# Altium PCB LimeSDR-Micro_mPCIe_1v4.PcbDoc (part 3 of 11)
Units mm, origin at the board's own origin, x right, y up, seen from the top; angles counter-clockwise.
Board outline 50.8 x 29.7 mm, 8 copper layers (Top, L2, L3, L4, L5, L6, L7, Bottom), stack 0.925 mm thick; 664 components, 386 nets, 2358 pads, 843 vias.
Unrouted connection lines stored in the file: 28.
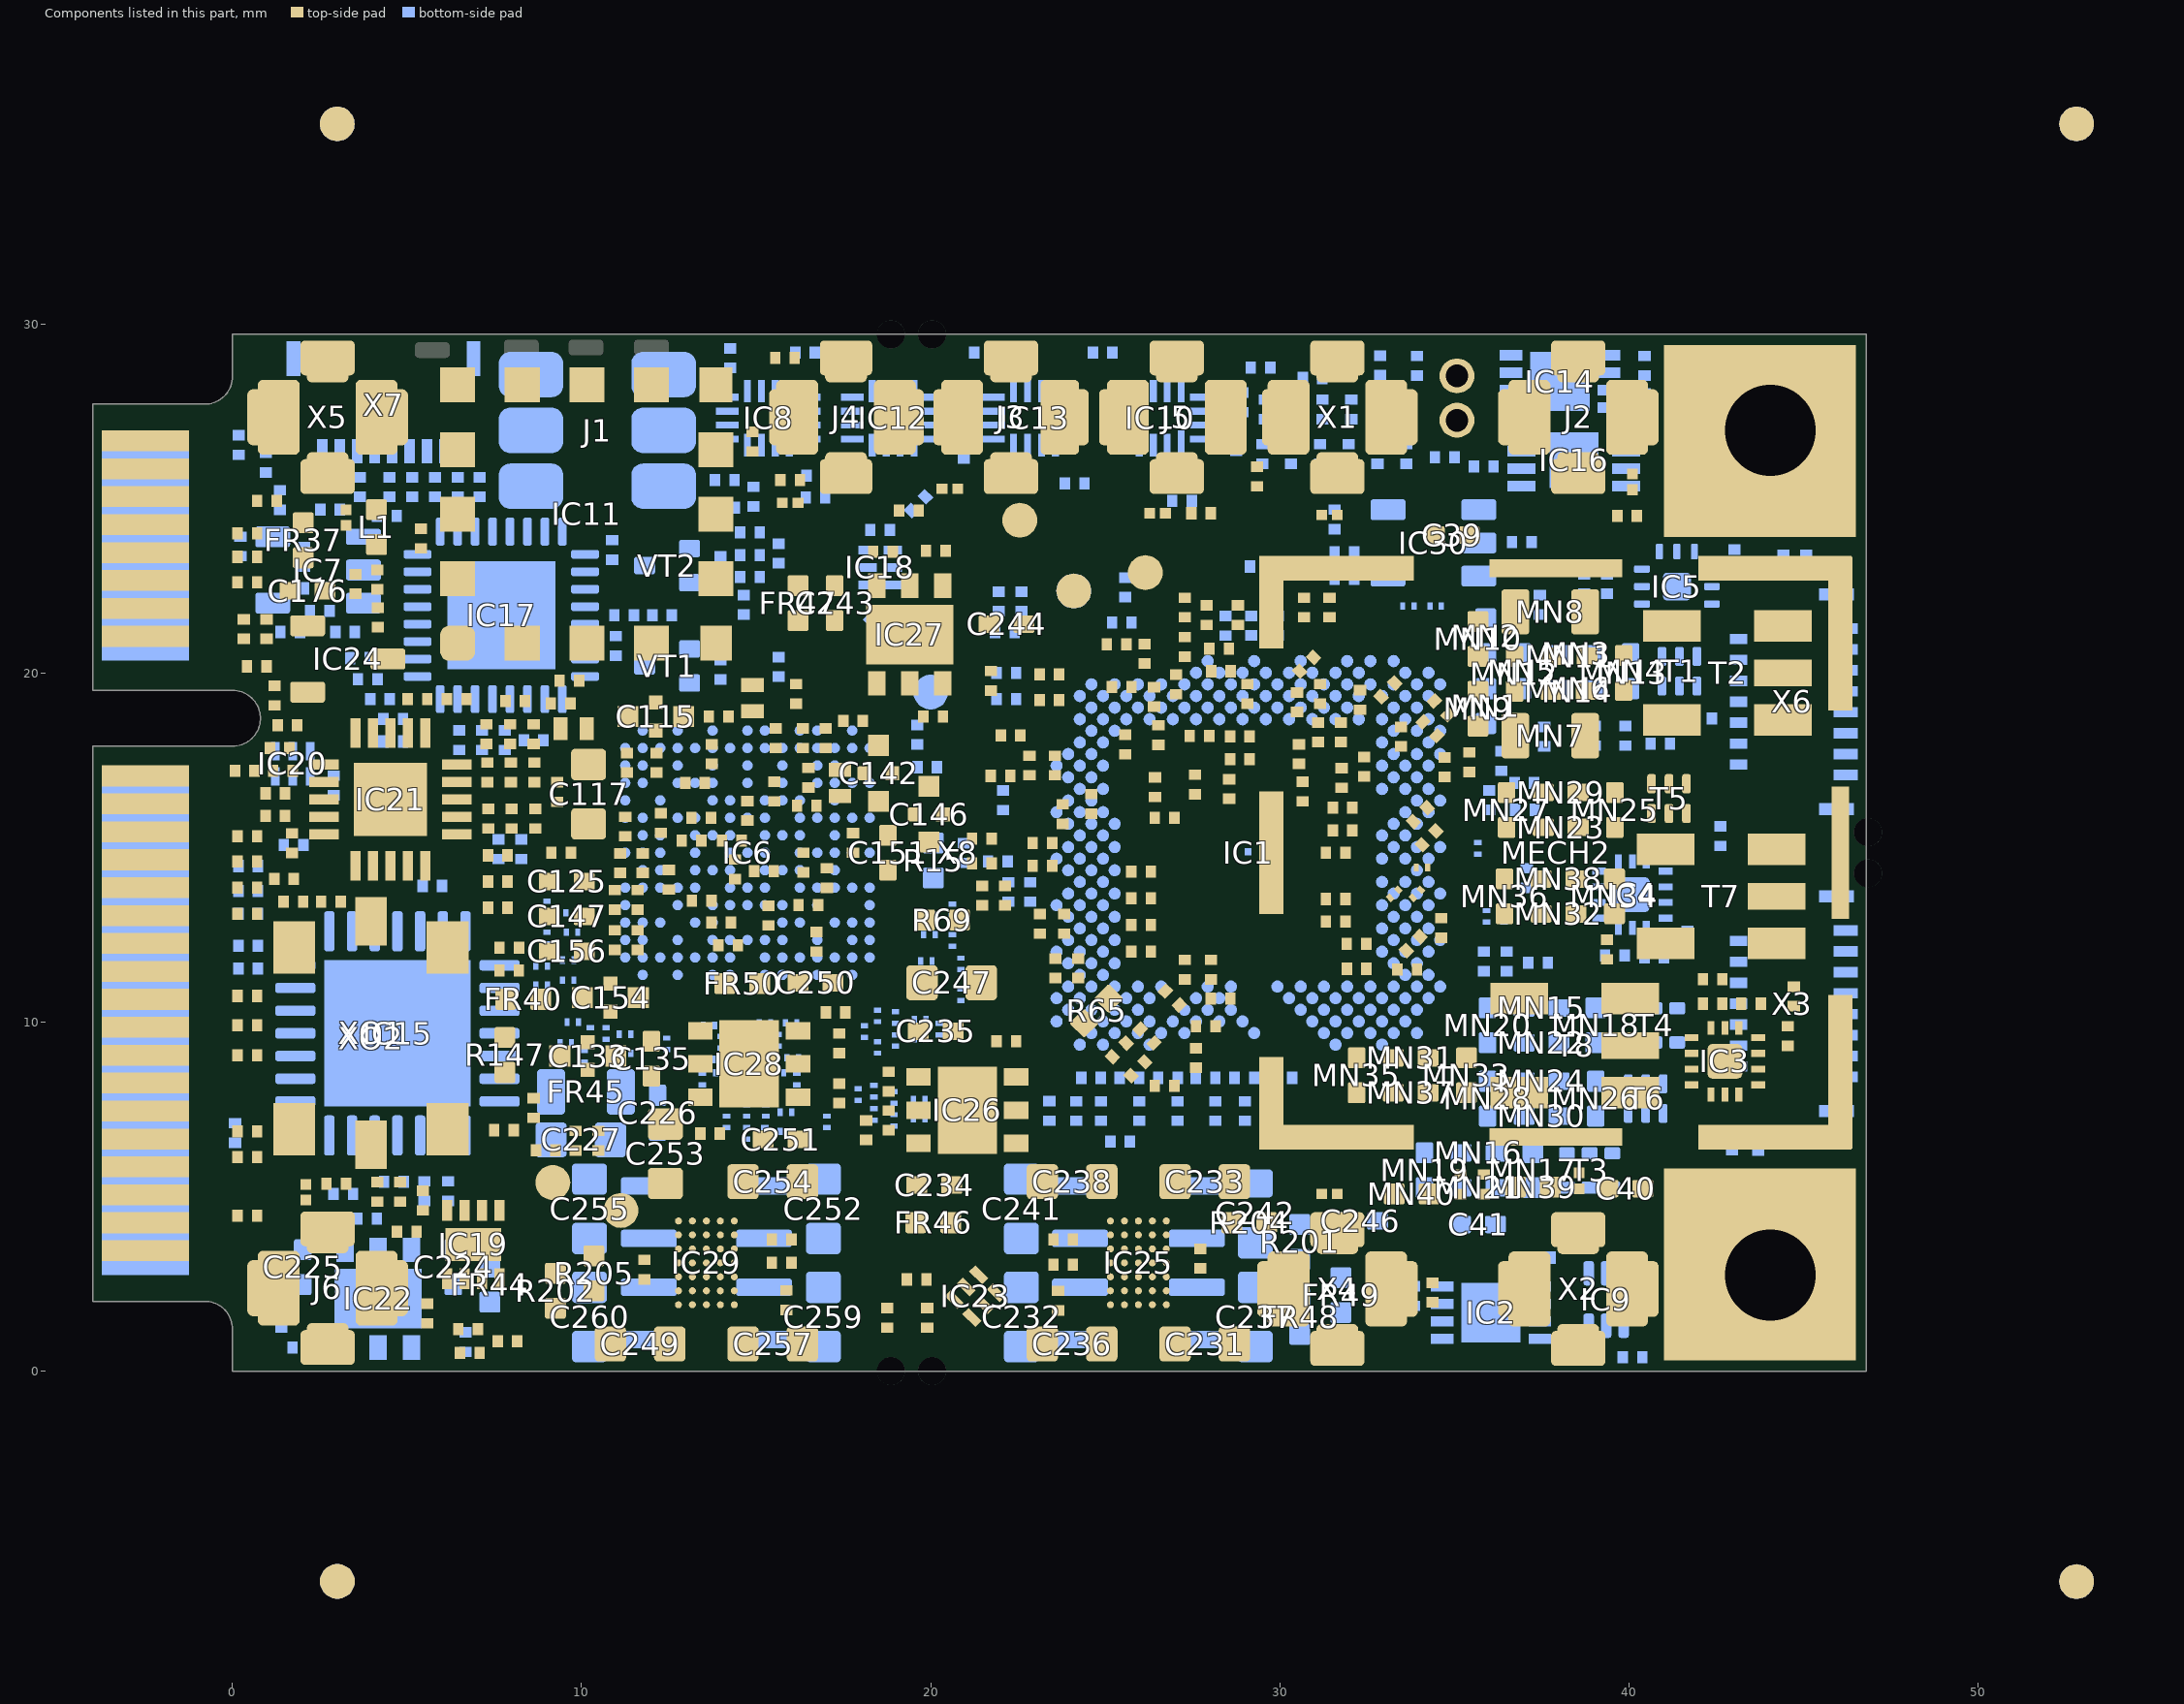
[diagram p8: the components of this part, seen from the top]

## Part data (continued)
C176 C224 C225 C234 C235 C243 C244 C246 C250 C251: library part Cap_0402, Capacitance=4.7µF, Manufacturer="Murata Electronics North America", Manufacturer Part Number 1=GRM155R60J475ME87D, Operating Temperature="-55°C ~ 85°C", Package / Case="0402 (1005 Metric)", Ratings=-, Supplier Part Number 1=490-5408-1-ND, Temperature Coefficient=X5R, Tolerance=±20%, Voltage - Rated=6.3V, Applications="General Purpose", Category=Capacitors, Features="Derating Recommended", Height - Seated (Max)=-, Lead Spacing=-, Lead Style=-, Mounting Type="Surface Mount, MLCC", Packaging="Cut Tape (CT)", Part Description="4.7µF ±20% 6.3V X5R Ceramic Capacitor -55°C ~ 85°C Surface Mount, MLCC 0402 (1005 Metric) 0.039\" L x 0.020\" W (1.00mm x 0.50mm)", RoHS="RoHS Compliant", Size / Dimension="0.039\" L x 0.020\" W (1.00mm x 0.50mm)", Supplier 1=Digi-Key, Thickness (Max)="0.022\" (0.55mm)"
C226: library part Cap_0402, Capacitance=1, Capacitance Tolerance="± 10%", Ceramic Capacitor Case="0402 [1005 Metric]", Dielectric Characteristic=X6, Manufacturer=TDK, Manufacturer Part Number 1=C1005X5R1E105K050BC, Supplier Part Number 1=445-9066-1-ND, Voltage Rating=10, MSL=-, Part Description="1µF ±10% 10V X5R Ceramic Capacitor -55°C ~ 85°C Surface Mount, MLCC 0402 (1005 Metric) 0.039\" L x 0.020\" W (1.00mm x 0.50mm)", Product Range="TDK - C Series", RoHS=YES, Supplier 1=Digi-Key
C227 C231 C233 C236 C238 C247 C249 C253 C254 C257: library part Cap_0603, Capacitance=10uF, Case/Package=0603, Case Code (Metric)=1608, Dielectric=X5R, Manufacturer=Murata, Manufacturer Part Number 1=GRM188R61A106ME69D, Max Operating Temperature=85°C, Min Operating Temperature=-55°C, Package Quantity=4000, Supplier Part Number 1=490-10475-1-ND, Tolerance=20%, Voltage Rating=10V, Case Code (Imperial)=0603, ComponentLink1Description=http://search.murata.co.jp/Ceramy/image/img/A01X/G101/ENG/GRM188R61C106MAAL-01.pdf?src-supplier=Digi-Key, ComponentLink1URL=http://search.murata.co.jp/Ceramy/image/img/A01X/G101/ENG/GRM188R61C106MAAL-01.pdf?src-supplier=Digi-Key, ComponentLink2Description=https://search.murata.co.jp/Ceramy/image/img/A01X/G101/ENG/GRM188R61C106MAAL-01.pdf?src-supplier=Digi-Key, ComponentLink2URL=https://search.murata.co.jp/Ceramy/image/img/A01X/G101/ENG/GRM188R61C106MAAL-01.pdf?src-supplier=Digi-Key, ComponentLink3Description=http://search.murata.co.jp/Ceramy/image/img/A01X/partnumbering_e_01.pdf?src-supplier=Digi-Key, ComponentLink3URL=http://search.murata.co.jp/Ceramy/image/img/A01X/partnumbering_e_01.pdf?src-supplier=Digi-Key, ComponentLink4Description=http://www.farnell.com/datasheets/1872210.pdf?src-supplier=Farnell, ComponentLink4URL=http://www.farnell.com/datasheets/1872210.pdf?src-supplier=Farnell, ComponentLink5Description=http://www.mouser.com/ds/2/281/c02e-2905.pdf?src-supplier=Mouser, ComponentLink5URL=http://www.mouser.com/ds/2/281/c02e-2905.pdf?src-supplier=Mouser, ComponentLink6Description=http://www.farnell.com/datasheets/1872210.pdf?src-supplier=Newark, ComponentLink6URL=http://www.farnell.com/datasheets/1872210.pdf?src-supplier=Newark, ComponentLink7Description=http://www.farnell.com/datasheets/2048014.pdf?src-supplier=Element14, ComponentLink7URL=http://www.farnell.com/datasheets/2048014.pdf?src-supplier=Element14, ComponentLink8Description=http://www.farnell.com/datasheets/1872210.pdf?src-supplier=Element14, ComponentLink8URL=http://www.farnell.com/datasheets/1872210.pdf?src-supplier=Element14, ComponentLink9Description=http://search.murata.co.jp/Ceramy/image/img/A01X/G101/ENG/GRM188R61A106ME69-01.pdf?src-supplier=Digi-Key, ComponentLink9URL=http://search.murata.co.jp/Ceramy/image/img/A01X/G101/ENG/GRM188R61A106ME69-01.pdf?src-supplier=Digi-Key, Depth=0.8mm, Height=0.8mm, Lead Free="Lead Free", Length=1.6mm, Material=Ceramic, Mount="Surface Mount", Packaging="Tape and Reel", Part Description="10 µF ±20% 10V Ceramic Capacitor X5R 0603 (1608 Metric)", Pricing 1="1=0,16000, 10=0,11200, 50=0,06360, 100=0,05270, 500=0,03696, 1000=0,03060 (USD)", RoHS=Yes, RoHS Compliant=Yes, Series=GRM, Stock 1=820978, Supplier 1=Digi-Key, Termination=SMD/SMT, Thickness=0.035inch, Voltage Rating (DC)=10V, Weight=0.000222oz, Width=0.8mm
D1 D2 D3: library part BAT46JFILM_shottky_diode, Average Rectified Current=100mA, Case/Package=0402, Case Code (Metric)=1006, Manufacturer=MCC, Max Reverse Voltage (DC)=30V, Supplier Part Number 1=RB521S-30L2-TPMSCT-ND, Case Code (Imperial)=0402, ComponentLink1Description=http://www.mccsemi.com/up_pdf/RB521S-30L2(DFN1006-2L)-A.pdf?src-supplier=Digi-Key, ComponentLink1URL=http://www.mccsemi.com/up_pdf/RB521S-30L2(DFN1006-2L)-A.pdf?src-supplier=Digi-Key, Manufacturer Part Number 1=RB521S-30L2-TP, Mount="Surface Mount", Packaging="Cut Tape", Part Description="DIODE SCHOTTKY 30V 100MA 2TDFN", Pricing 1="1=0,24, 10=0,165, 100=0,0805, 500=0,06712, 1000=0,04664, 2000=0,04043, 5000=0,0375 (USD)", RoHS=Yes, RoHS Compliant=Yes, Series=-, Stock 1=268886, Supplier 1=Digi-Key
ESD1 ESD2 ESD3 ESD4 ESD5 ESD6 ESD7 ESD8 ESD9: Capacitance @ Frequency="0.2pF @ 1MHz", Current - Peak Pulse (10/1000µs)="3A (8/20µs)", Manufacturer="ON Semiconductor", Manufacturer Part Number 1=ESD8472MUT5G, Operating Temperature="-55°C ~ 150°C (TJ)", Package / Case=2-XFDFN, Power - Peak Pulse=-, Power Line Protection=No, Supplier Device Package="2-X3DFN (0.62x0.32)", Supplier Part Number 1=ESD8472MUT5GOSCT-ND, Voltage - Breakdown (Min)=7V, Voltage - Clamping (Max) @ Ipp=14V, Voltage - Reverse Standoff (Typ)="5.3V (Max)", Applications="Automotive, RF Antenna", Category="Circuit Protection", ComponentLink1Description=http://www.onsemi.com/pub/Collateral/ESD8472-D.PDF, ComponentLink1URL=http://www.onsemi.com/pub/Collateral/ESD8472-D.PDF, Mounting Type="Surface Mount", Packaging="Cut Tape (CT)", Part Description="TVS DIODE 5.3VWM 14VC X3DFN2", Part Status=Active, Pricing 1="1=0.39, 10=0.315, 100=0.2142, 500=0.16068, 1000=0.12051 (USD)", RoHS="RoHS Compliant", Stock 1=2295, Supplier 1=Digi-Key, Type=Zener
FR1 FR2 FR3 FR4 FR5 FR6 FR7 FR8 FR9 FR10 FR11 FR12 FR13 FR14 FR15 FR16 FR17 FR18 FR19 FR20 FR21 FR22 FR23 FR24 FR25 FR26 FR27 FR28 FR29 FR30 FR31 FR32 FR33 FR34 FR35 FR36 FR38 FR39 FR41 FR42 FR43 FR51: library part Ferrite, Current Rating=270mA, DC Resistance (DCR)="750 mOhm Max", Impedance @ Frequency="600 Ohm @ 100MHz", Manufacturer="Taiyo Yuden", Manufacturer Part Number 1=BK0603TS601-T, Package / Case="0201 (0603 Metric)", Supplier Part Number 1=587-3277-1-ND, Category=Filters, Filter Type="Differential Mode - Single", Height (Max)="0.013\" (0.33mm)", Mounting Type="Surface Mount", Packaging="Cut Tape (CT)", Part Description="FERRITE BEAD 600 OHM 0201 1LN", RoHS="RoHS Compliant", Size / Dimension="0.024\" L x 0.012\" W (0.60mm x 0.30mm)", Supplier 1=Digi-Key
FR37 FR40 FR44 FR46 FR47 FR48 FR49 FR50: library part Ferrite, Current Rating=900mA, DC Resistance (DCR)="220 mOhm Max", Impedance @ Frequency="220 Ohm @ 100MHz", Manufacturer="TDK Corporation", Manufacturer Part Number 1=MPZ1005S221ET000, Package / Case="0402 (1005 Metric)", Supplier Part Number 1=445-9329-2-ND, Category=Filters, Part Description="FERRITE BEAD 220 OHM 0402 1LN", Supplier 1=Digi-Key
FR45: library part Ferrite, Current Rating=2A, DC Resistance (DCR)="100 mOhm Max", Impedance @ Frequency="600 Ohm @ 100MHz", Manufacturer="TDK Corporation", Manufacturer Part Number 1=MPZ2012S601AT000, Package / Case="0805 (2012 Metric)", Supplier Part Number 1=445-2206-2-ND, Category=Filters, Filter Type="Differential Mode - Single", Height (Max)="0.041\" (1.05mm)", Mounting Type="Surface Mount", Packaging="Tape & Reel (TR)", Part Description="FERRITE BEAD 600 OHM 0805 1LN", RoHS="RoHS Compliant", Size / Dimension="0.079\" L x 0.049\" W (2.00mm x 1.25mm)", Supplier 1=Digi-Key
IC1: library part LMS7002Mr4, "Schematic symbol revision 4. Default footprint - 0.31mm pad", Manufacturer="Lime Microsystems", Manufacturer Part Number 1=LMS7002M, Part Description="IC FPRF Transceiver LMS7002M; 261 pin aQFN", Supplier 1="Lime Microsystems", Supplier Part Number 1=LMS7002M
IC2: library part M24128-DFMC6TG, Manufacturer=STMicroelectronics, Operating Temperature="-40°C ~ 85°C (TA)", Package / Case="8-UFDFN Exposed Pad", Supplier Device Package="8-UFDFPN (2x3)", Supplier Part Number 1=497-15739-1-ND, Voltage - Supply="1.7 V ~ 5.5 V", Category="Integrated Circuits (ICs)", ComponentLink1Description=http://www.st.com/content/ccc/resource/technical/document/datasheet/59/05/c9/5b/7b/41/48/b6/CD00259167.pdf/files/CD00259167.pdf/jcr:content/translations/en.CD00259167.pdf, ComponentLink1URL=http://www.st.com/content/ccc/resource/technical/document/datasheet/59/05/c9/5b/7b/41/48/b6/CD00259167.pdf/files/CD00259167.pdf/jcr:content/translations/en.CD00259167.pdf, Manufacturer Part Number 1=M24128-DFMC6TG, Memory Format=EEPROM, Memory Interface=I²C, Memory Size="128Kb (16K x 8)", Memory Type=Non-Volatile, Mounting Type="Surface Mount", Packaging="Cut Tape (CT)", Part Description="EEPROM Memory IC 128Kb (16K x 8) I²C 1MHz 450ns 8-UFDFPN (2x3)", Part Status=Active, Pricing 1="1=0.35, 10=0.348, 100=0.2854, 500=0.27748, 1000=0.27004 (USD)", RoHS="RoHS Compliant", Stock 1=5894, Supplier 1=Digi-Key, Technology=EEPROM, Write Cycle Time - Word, Page=5ms
IC3 IC4: library part SKY13414-485LF_RF_SW, Case/Package=QFN, Manufacturer="Skyworks Solutions", Max Operating Temperature=85°C, Min Operating Temperature=-40°C, Package Quantity=3000, Supplier Part Number 1=863-1582-1-ND, ComponentLink1Description=https://datasheet.ciiva.com/15309/sky13414-485lf-201689g-231640-15309794.pdf?src-supplier=Mouser, ComponentLink1URL=https://datasheet.ciiva.com/15309/sky13414-485lf-201689g-231640-15309794.pdf?src-supplier=Mouser, IIP3=70dBm, Impedance=50R, Manufacturer Part Number 1=SKY13414-485LF, P1dB=37dBm, Packaging="Tape and Reel", Part Description="RF Switch IC General Purpose SP4T 3 GHz 50Ohm 14-QFN (2x2)", Pricing 1="1=1,35000, 10=1,20700, 25=1,14520, 100=0,94070, 250=0,87936, 500=0,77710, 1000=0,61350 (USD)", RoHS=Yes, RoHS Compliant=Yes, Stock 1=43522, Supplier 1=Digi-Key, Throw Configuration=SP4T
IC5: library part SKY13330-397LF_RF_SW, Case/Package=QFN, Frequency=100MHz, Manufacturer="Skyworks Solutions", Max Frequency=6GHz, Max Operating Temperature=85°C, Min Operating Temperature=-40°C, Package Quantity=3000, Supplier Part Number 1=863-1643-1-ND, ComponentLink1Description=https://datasheet.ciiva.com/15100/getdatasheetpartid-656010-15100460.pdf?src-supplier=Verical, ComponentLink1URL=https://datasheet.ciiva.com/15100/getdatasheetpartid-656010-15100460.pdf?src-supplier=Verical, Contact Plating=Tin,Matte, Impedance=50R, Insertion Loss=0.65dB, Manufacturer Part Number 1=SKY13330-397LF, Mount="Surface Mount", Number of Pins=12, P1dB=39dBm, Packaging="Tape and Reel", Part Description="RF Switch IC W-CDMA SPDT 6 GHz 50Ohm 12-QFN (2x2)", Pricing 1="1=0,99000, 10=0,88800, 25=0,84280, 100=0,69230, 250=0,64716, 500=0,57190, 1000=0,45150 (USD)", Radiation Hardening=No, RoHS=Yes, Stock 1=596826, Supplier 1=Digi-Key, Throw Configuration=SPDT, Turn-Off Delay Time=1.6us, Turn-On Delay Time=1.6us, Weight=0.000776oz
IC6: Manufacturer="NXP Semiconductors", Manufacturer Part Number 1=LA9310X7S11AA, Part Description="LFBGA157, low profile, fine-pitch ball grid array package, 157 terminals, 0.5 mm pitch, 8 mm x 8 mm x 1.25 mm body.", Supplier 1="NXP Semiconductors", Supplier Part Number 1=LA9310X7S11AA
IC7: Driver Case Style=SOT-23, Manufacturer="TEXAS INSTRUMENTS", Manufacturer Part Number 1=SN65LVDS1DBVR, Supplier Part Number 1=76C0715, Supply Voltage Max=3.6, Supply Voltage Min=2.4, No. of Pins=5, Part Description="DIFFERENTIAL LINE DRIVER/RECEIVER SIGNAL SOT23-5", Supplier 1=Newark
IC8 IC10 IC12 IC13: Manufacturer="Texas Instruments", Manufacturer Part Number 1=SN74AVC4T774RSVR, Operating Temperature="-40°C ~ 85°C", Package / Case=16-UFQFN, Supplier Device Package="16-UQFN (2.6x1.8)", Supplier Part Number 1=296-24741-6-ND, Voltage - Supply="1.2 V ~ 3.6 V", Category="Integrated Circuits (ICs)", Data Rate=380Mbps, Differential - Input:Output=No/No, Input Type=Logic, Logic Function="Translator, Bidirectional, 3-State", Mounting Type="Surface Mount", Number of Bits=4, Number of Channels=4, Number of Outputs/Channel=1, Output Type=Logic, Packaging=Digi-Reel®, Part Description="Voltage Level Translator Bidirectional 1 Circuit 4 Channel 380Mbps 16-UQFN (2.6x1.8)", Propagation Delay (Max)=2.4ns, RoHS="RoHS Compliant", Supplier 1=Digi-Key
IC9: library part TMP1075NDRLR_temperature_sensor, Manufacturer="Texas Instruments", Supplier Part Number 1=296-TMP1075NDRLRCT-ND, Manufacturer Part Number 1=TMP1075NDRLR, Part Description="Temperature Sensor Digital, Local -40°C ~ 125°C 12 b SOT-563", Pricing 1="1=0,67000, 5=0,63800, 10=0,55500, 25=0,48760, 50=0,40500, 100=0,34500, 500=0,30000, 1000=0,26250 (USD)", RoHS=No, RoHS Compliant=Yes, Stock 1=3405, Supplier 1=Digi-Key
IC11: library part M10578-A3_GPS_GNSS, Current - Receiving=28mA, Frequency=1.575GHz, Manufacturer=Antenova, Manufacturer Part Number 1=M10578-A3, Operating Temperature="-40°C ~ 85°C", Package / Case=Module, Supplier Part Number 1=627-1074-1-ND, Voltage - Supply=3.3V, Antenna Connector=-, Applications="General Purpose", Category="RF/IF and RFID", ComponentLink1Description=http://www.antenova-m2m.com/wp-content/uploads/2015/12/GPS_Radionova_M10578-A3-PS-1.0.pdf, ComponentLink1URL=http://www.antenova-m2m.com/wp-content/uploads/2015/12/GPS_Radionova_M10578-A3-PS-1.0.pdf, Data Interface=UART, Data Rate (Max)=-, Features=-, Memory Size=-, Modulation or Protocol=GPS, Packaging="Cut Tape (CT)", Part Description="RADIONOVA RF Receiver GPS 1.575GHz -165dBm Module", Part Status=Active, Pricing 1="1=17.75, 10=16.061, 25=14.7928, 100=13.5248, 250=12.67952, 500=11.8342 (USD)", RoHS="RoHS Compliant", Sensitivity=-165dBm, Stock 1=0, Supplier 1=Digi-Key, Supplier Device Package=Module
IC14: library part M24128-DFMC6TG, Manufacturer=STMicroelectronics, Manufacturer Part Number 1=M24512-DFMC6TG, Supplier Part Number 1=497-15745-1-ND, ComponentLink1Description=http://www.st.com/content/ccc/resource/technical/document/datasheet/59/05/c9/5b/7b/41/48/b6/CD00259167.pdf/files/CD00259167.pdf/jcr:content/translations/en.CD00259167.pdf, ComponentLink1URL=http://www.st.com/content/ccc/resource/technical/document/datasheet/59/05/c9/5b/7b/41/48/b6/CD00259167.pdf/files/CD00259167.pdf/jcr:content/translations/en.CD00259167.pdf, ComponentLink2Description=https://datasheet.ciiva.com/29611/cd00251873-29611552.pdf?src-supplier=Digi-Key, ComponentLink2URL=https://datasheet.ciiva.com/29611/cd00251873-29611552.pdf?src-supplier=Digi-Key, Part Description="IC EEPROM 512KBIT I2C 8UFDFPN", Pricing 1="1=1,03, 10=0,935, 25=0,9232, 50=0,9178, 100=0,8206, 250=0,81368, 500=0,80166, 1000=0,77298 (USD)", RoHS=Yes, Stock 1=12789, Supplier 1=Digi-Key
IC15: library part MCP23017-E/ML_I2C_expander, Manufacturer=Microchip, Supplier Part Number 1=MCP23017-E/ML-ND, ComponentLink1Description=https://datasheet.ciiva.com/1496/12179-1496011.pdf?src-supplier=Element14, ComponentLink1URL=https://datasheet.ciiva.com/1496/12179-1496011.pdf?src-supplier=Element14, ComponentLink2Description=https://datasheet.ciiva.com/1780/21952b-1780121.pdf?src-supplier=Digi-Key, ComponentLink2URL=https://datasheet.ciiva.com/1780/21952b-1780121.pdf?src-supplier=Digi-Key, ComponentLink3Description=https://datasheet.ciiva.com/3149/21952b-3149158.pdf?src-supplier=Avnet, ComponentLink3URL=https://datasheet.ciiva.com/3149/21952b-3149158.pdf?src-supplier=Avnet, ComponentLink4Description=https://datasheet.ciiva.com/16222/filehandler-aspxddocname-en023709-16222331.pdf?src-supplier=Future+Electronics, ComponentLink4URL=https://datasheet.ciiva.com/16222/filehandler-aspxddocname-en023709-16222331.pdf?src-supplier=Future+Electronics, Manufacturer Part Number 1=MCP23017-E/ML, Part Description="I/O Expander 16 I²C 1.7 MHz 28-QFN (6x6)", Pricing 1="1=1,9, 25=1,59, 100=1,44 (USD)", RoHS=Yes, Stock 1=3965, Supplier 1=Digi-Key
IC16: library part ATECC508A_authentication_IC, Manufacturer=Microchip, Manufacturer Part Number 1=ATECC508A-MAHDA-S, Supplier Part Number 1=ATECC508A-MAHDA-SDKR-ND, Part Description="Authentication Chip IC Networking and Communications 8-UDFN (2x3)", Pricing 1="1=0.73, 25=0.7064 (USD)", Stock 1=27941, Supplier 1=Digi-Key
IC17: Frequency - Max=200MHz, Manufacturer="Texas Instruments", Manufacturer Part Number 1=LMK00101SQE/NOPB, Operating Temperature="-40°C ~ 85°C", Package / Case="32-WFQFN Exposed Pad", Supplier Device Package="32-WQFN (5x5)", Supplier Part Number 1=296-39036-1-ND, Voltage - Supply="2.375 V ~ 3.45 V", Category="Integrated Circuits (ICs)", Differential - Input:Output=Yes/No, Input="HCSL, LVCMOS, LVDS, LVPECL, LVTTL, SSTL, Crystal", Mounting Type="Surface Mount", Number of Circuits=1, Output="LVCMOS, LVTTL", Packaging="Cut Tape (CT)", Part Description="Clock Fanout Buffer (Distribution), Multiplexer, Translator IC 200MHz 32-WFQFN Exposed Pad", Ratio - Input:Output=3:10, RoHS="RoHS Compliant", Supplier 1=Digi-Key, Type="Fanout Buffer (Distribution), Multiplexer, Translator"
IC18 IC20 IC23: library part 74LVC1G3157FZ4_SPDT_SW, Manufacturer=Diodes, Manufacturer Part Number 1=74LVC1G3157FZ4-7, Max Operating Temperature=125°C, Min Operating Temperature=-40°C, On-State Resistance=10R, Supplier Part Number 1=74LVC1G3157FZ4-7DICT-ND, -3db Bandwidth=300MHz, ComponentLink1Description=https://www.diodes.com/assets/Datasheets/74LVC1G3157.pdf?src-supplier=Digi-Key, ComponentLink1URL=https://www.diodes.com/assets/Datasheets/74LVC1G3157.pdf?src-supplier=Digi-Key, ComponentLink2Description=https://www.diodes.com/assets/product-showcases/74LVC3157-NPA-0516.pdf?src-supplier=Digi-Key, ComponentLink2URL=https://www.diodes.com/assets/product-showcases/74LVC3157-NPA-0516.pdf?src-supplier=Digi-Key, Number of Circuits=1, Number of Pins=6, Packaging="Tape and Reel", Part Description="1 Circuit IC Switch 2:1 10Ohm X2-DFN1410-6", Pricing 1="1=0,42000, 10=0,31200, 25=0,27320, 100=0,17670, 250=0,14628, 500=0,11702, 1000=0,08972, 2500=0,07802 (USD)", RoHS=Yes, RoHS Compliant=Yes, Stock 1=158709, Supplier 1=Digi-Key
IC19: library part AD5693RACPZ-1RL7_DAC, Manufacturer="Analog Devices", Supplier Part Number 1=505-AD5693BCPZ-RL7CT-ND, ComponentLink1Description=http://www.mouser.com/ds/2/609/AD5693R_5692R_5691R_5693-534178.pdf?src-supplier=Mouser, ComponentLink1URL=http://www.mouser.com/ds/2/609/AD5693R_5692R_5691R_5693-534178.pdf?src-supplier=Mouser, ComponentLink2Description=https://www.analog.com/media/en/technical-documentation/data-sheets/AD5693R_5692R_5691R_5693.pdf?src-supplier=Digi-Key, ComponentLink2URL=https://www.analog.com/media/en/technical-documentation/data-sheets/AD5693R_5692R_5691R_5693.pdf?src-supplier=Digi-Key, ComponentLink3Description=http://www.analog.com/static/imported-files/data_sheets/AD5693R_5692R_5691R.pdf?src-supplier=Avnet, ComponentLink3URL=http://www.analog.com/static/imported-files/data_sheets/AD5693R_5692R_5691R.pdf?src-supplier=Avnet, ComponentLink4Description=http://www.analog.com/media/en/technical-documentation/data-sheets/AD5693R_5692R_5691R_5693.pdf?src-supplier=Digi-Key, ComponentLink4URL=http://www.analog.com/media/en/technical-documentation/data-sheets/AD5693R_5692R_5691R_5693.pdf?src-supplier=Digi-Key, ComponentLink5Description=https://www.analog.com/media/en/technical-documentation/data-sheets/AD5693R_5692R_5691R_5693.pdf?src-supplier=Digikey, ComponentLink5URL=https://www.analog.com/media/en/technical-documentation/data-sheets/AD5693R_5692R_5691R_5693.pdf?src-supplier=Digikey, ComponentLink6Description=http://www.analog.com/media/en/technical-documentation/data-sheets/AD5693R_5692R_5691R_5693.pdf?src-supplier=Digikey, ComponentLink6URL=http://www.analog.com/media/en/technical-documentation/data-sheets/AD5693R_5692R_5691R_5693.pdf?src-supplier=Digikey, ComponentLink7Description=http://www.analog.com/static/imported-files/data_sheets/AD5693R_5692R_5691R_5693.pdf?src-supplier=Avnet, ComponentLink7URL=http://www.analog.com/static/imported-files/data_sheets/AD5693R_5692R_5691R_5693.pdf?src-supplier=Avnet, ComponentLink8Description=http://www.farnell.com/datasheets/1863077.pdf?src-supplier=Element14, ComponentLink8URL=http://www.farnell.com/datasheets/1863077.pdf?src-supplier=Element14, ComponentLink9Description=https://datasheet.octopart.com/AD5693BCPZ-RL7-Analog-Devices-datasheet-79096046.pdf?src-supplier=Element14, ComponentLink9URL=https://datasheet.octopart.com/AD5693BCPZ-RL7-Analog-Devices-datasheet-79096046.pdf?src-supplier=Element14, Manufacturer Part Number 1=AD5693BCPZ-RL7, Part Description="16 Bit Digital to Analog Converter 1 8-LFCSP-UD (2x2)", Pricing 1="1=9,21, 10=6,366, 25=5,6328, 100=4,8123, 250=4,41452, 500=4,17228, 1000=3,97118 (USD)", RoHS=Yes, Stock 1=5532, Supplier 1=Digikey
IC21: Manufacturer="Analog Devices Inc", Manufacturer Part Number 1=ADF4002BCPZ-RL7, Operating Temperature="-40°C ~ 85°C", Package / Case="20-VFQFN Exposed Pad, CSP", Supplier Part Number 1=ADF4002BCPZ-RL7CT-ND, Voltage - Supply="2.7 V ~ 3.3 V", Category="Integrated Circuits (ICs)", Differential - Input:Output=Yes/No, Input="CMOS, TTL", Mounting Type="Surface Mount", Part Description="IC PLL FREQUENCY SYNTH 20-LFCSP", Ratio - Input:Output=2:1, Supplier=Digi-Key, Supplier 1=Digi-Key, Type="Clock/Frequency Synthesizer (RF), Phase Detector"
IC22 IC26 IC27 IC28: Current - Output=1A, Current - Supply="50µA ~ 300µA", Manufacturer=STMicroelectronics, Operating Temperature="-40°C ~ 125°C", Package / Case="6-VDFN Exposed Pad", Supplier Device Package="6-DFN (3x3)", Supplier Part Number 1=497-11013-1-ND, Voltage - Input (Max)=5.5V, Voltage - Output (Max)=4.6V, Voltage - Output (Min/Fixed)=0.8V, Voltage Dropout (Max)="0.4V @ 1A", Category="Integrated Circuits (ICs)", ComponentLink1Description=http://www.st.com/content/ccc/resource/technical/document/datasheet/72/02/e5/ee/df/36/40/5e/CD00233788.pdf/files/CD00233788.pdf/jcr:content/translations/en.CD00233788.pdf, ComponentLink1URL=http://www.st.com/content/ccc/resource/technical/document/datasheet/72/02/e5/ee/df/36/40/5e/CD00233788.pdf/files/CD00233788.pdf/jcr:content/translations/en.CD00233788.pdf, Control Features="Enable, Power Good", Manufacturer Part Number 1=LD39100PUR, Mounting Type="Surface Mount", Output Configuration=Positive, Output Type=Adjustable, Packaging="Cut Tape (CT)", Part Description="Linear Voltage Regulator IC Positive Adjustable Output 0.8 V ~ 4.5 V 1A 6-DFN (3x3)", Part Status=Active, Pricing 1="1=0.85, 10=0.76, 100=0.5923, 500=0.48926, 1000=0.38625 (USD)", Protection Features="Over Current, Over Temperature, Short Circuit", PSRR="70dB ~ 65dB (1kHz ~ 10kHz)", RoHS="RoHS Compliant", Stock 1=27970, Supplier 1=Digi-Key
IC24: library part VOLTAGE_REFERENCE_UNIVERSAL, Manufacturer=Diodes, Manufacturer Part Number 1=AS431ANTR-G1, Supplier Part Number 1=AS431ANTR-G1DICT-ND, ComponentLink1Description=https://datasheet.ciiva.com/1177/1643148-1177233.pdf?src-supplier=Avnet, ComponentLink1URL=https://datasheet.ciiva.com/1177/1643148-1177233.pdf?src-supplier=Avnet, ComponentLink2Description=https://datasheet.ciiva.com/30002/as431-30002029.pdf?src-supplier=Avnet, ComponentLink2URL=https://datasheet.ciiva.com/30002/as431-30002029.pdf?src-supplier=Avnet, ComponentLink3Description=https://datasheet.ciiva.com/29572/as431-29572149.pdf?src-supplier=Digi-Key, ComponentLink3URL=https://datasheet.ciiva.com/29572/as431-29572149.pdf?src-supplier=Digi-Key, ComponentLink4Description=https://datasheet.ciiva.com/29572/as431-29572150.pdf?src-supplier=Digi-Key, ComponentLink4URL=https://datasheet.ciiva.com/29572/as431-29572150.pdf?src-supplier=Digi-Key, ComponentLink5Description=https://datasheet.ciiva.com/8132/lm4040-8132551.pdf?src-supplier=Avnet, ComponentLink5URL=https://datasheet.ciiva.com/8132/lm4040-8132551.pdf?src-supplier=Avnet, ComponentLink6Description=https://datasheet.ciiva.com/29572/as431-29572149.pdf?src-supplier=Digikey, ComponentLink6URL=https://datasheet.ciiva.com/29572/as431-29572149.pdf?src-supplier=Digikey, ComponentLink7Description=https://datasheet.ciiva.com/29572/as431-29572150.pdf?src-supplier=Digikey, ComponentLink7URL=https://datasheet.ciiva.com/29572/as431-29572150.pdf?src-supplier=Digikey, Part Description="Shunt Voltage Reference IC Adjustable 2.5V 36 VV ±0.5% 100 mA SOT-23-3", Pricing 1="1=0,32, 10=0,196, 25=0,162, 100=0,1226, 250=0,10304, 500=0,09098, 1000=0,08085 (USD)", RoHS=Yes, Stock 1=655820, Supplier 1=Digikey
IC25 IC29: library part LP8758A1E0YFFR_QUAD_DC-DC, Manufacturer="Texas Instruments", Supplier Part Number 1=296-LP8758A2E3YFFRCT-ND, ComponentLink1Description=http://www.ti.com/general/docs/suppproductinfo.tsp?distId=10&amp;gotoUrl=http%3A%2F%2Fwww.ti.com%2Flit%2Fgpn%2Flp8758-e0&src-supplier=Digi-Key, ComponentLink1URL=http://www.ti.com/general/docs/suppproductinfo.tsp?distId=10&amp;gotoUrl=http%3A%2F%2Fwww.ti.com%2Flit%2Fgpn%2Flp8758-e0&src-supplier=Digi-Key, ComponentLink2Description=http://www.ti.com/lit/gpn/lp8758-e0?src-supplier=Mouser, ComponentLink2URL=http://www.ti.com/lit/gpn/lp8758-e0?src-supplier=Mouser, ComponentLink3Description=http://www.ti.com/lit/ds/symlink/lp8758-e0.pdf?src-supplier=Digi-Key, ComponentLink3URL=http://www.ti.com/lit/ds/symlink/lp8758-e0.pdf?src-supplier=Digi-Key, Manufacturer Part Number 1=LP8758A2E3YFFR, Pricing 1="1=5,83, 10=5,235, 25=4,9496, 100=4,2896, 250=4,0696, 500=3,65164, 1000=3,07969 (USD)", RoHS=Yes, Stock 1=5990, Supplier 1=Digi-Key
  IC25: Part Description="Buck Switching Regulator IC Positive Programmable 0.5V 4 Output 4A 35-UFBGA, DSBGA"
  IC29: Part Description="Switching Voltage Regulators Four-phase, four 4A output DC-DC step-down converters 35-DSBGA -40 to 85"
IC30: library part AP7330-W5-7_LDO, Manufacturer=Diodes, Manufacturer Part Number 1=AP7330-W5-7, Supplier Part Number 1=AP7330-W5-7DICT-ND, ComponentLink1Description=https://datasheet.octopart.com/AP7330-W5-7-Diodes-Inc.-datasheet-149521347.pdf?src-supplier=Farnell, ComponentLink1URL=https://datasheet.octopart.com/AP7330-W5-7-Diodes-Inc.-datasheet-149521347.pdf?src-supplier=Farnell, ComponentLink2Description=https://www.diodes.com/assets/Datasheets/AP7330.pdf?src-supplier=Digi-Key, ComponentLink2URL=https://www.diodes.com/assets/Datasheets/AP7330.pdf?src-supplier=Digi-Key, Part Description="Linear Voltage Regulator IC Positive Adjustable 1 Output 300mA SOT-25", Pricing 1="1=0,35, 10=0,286, 25=0,2616, 100=0,1946, 250=0,17632, 500=0,14592, 1000=0,10944 (USD)", RoHS=Yes, Stock 1=50531, Supplier 1=Digi-Key
J1: library part Molex_0788641001_spring_contacts, "Header, 6-pin", Manufacturer=Molex, Manufacturer Part Number 1=78864-1001, Supplier Part Number 1=WM11204CT-ND, Voltage Rating=10V, ComponentLink1Description=http://www.farnell.com/datasheets/2216617.pdf?src-supplier=Farnell, ComponentLink1URL=http://www.farnell.com/datasheets/2216617.pdf?src-supplier=Farnell, ComponentLink2Description=http://www.farnell.com/datasheets/2216617.pdf?src-supplier=Newark, ComponentLink2URL=http://www.farnell.com/datasheets/2216617.pdf?src-supplier=Newark, ComponentLink3Description=http://www.farnell.com/datasheets/1862322.pdf?src-supplier=Element14, ComponentLink3URL=http://www.farnell.com/datasheets/1862322.pdf?src-supplier=Element14, Contact Material="Copper Alloy", Glow Wire Compliant=Non-compliant, Halogen Free="Low Halogen", Number of Circuits=6, Number of Contacts=6, Orientation=Vertical, Part Description="6 Position Spring Battery Contact Connector Surface Mount", Pricing 1="1=0,45000, 10=0,36500, 100=0,26730, 1000=0,21263 (USD)", RoHS=Yes, Stock 1=133097, Supplier 1=Digi-Key, Voltage Rating (DC)=10V
J2 J3 J4 J5 J6 X1 X2 X4 X5: library part RF_IF_connector, "CONN UMC RCPT STR 50 OHM SMD", Dielectric Material="Liquid Crystal Polymer (LCP)", Frequency - Max=6GHz, Housing Color=Silver, Manufacturer="Molex, LLC", Manufacturer Part Number 1=0734120110, Operating Temperature="-40°C ~ 90°C", Supplier Part Number 1=WM5587CT-ND, Voltage Rating=60V, Body Finish=Nickel, Body Material="Phosphor Bronze", Cable Group=-, Category="Connectors, Interconnects", Center Contact Material=Brass, Center Contact Plating=Gold, Connector Style="Ultra Miniature Coaxial", Connector Type="Jack, Male Pin", Contact Termination=Solder, Fastening Type=Snap-On, Features=-, Impedance="50 Ohm", Ingress Protection=-, Mounting Type="Surface Mount", Packaging="Cut Tape (CT)", RoHS="RoHS Compliant", Shield Termination=Solder, Supplier 1=Digi-Key
  J2 J4 J5 X1 X2 X4 X5: Part Description="Ultra Miniature Coaxial Connector Receptacle, Male Pin 50 Ohm Surface Mount Solder"
  J3 J6: Part Description="CONN UMC RCPT STR 50 OHM SMD"
JMP1: library part JUMP_2P_CONN_HEADER, "Shorting Jumper, 2-position, 1.27mm pitch", Manufacturer=Sullins, Manufacturer Part Number 1=NPB02SVAN-RC, Supplier Part Number 1=S9345-ND, ComponentLink1Description=https://datasheet.octopart.com:443/NPB02SVAN-RC-Sullins-datasheet-181250459.pdf?src-supplier=IHS, ComponentLink1URL=https://datasheet.octopart.com:443/NPB02SVAN-RC-Sullins-datasheet-181250459.pdf?src-supplier=IHS, ComponentLink2Description=https://datasheet.octopart.com:443/NPB02SVAN-RC-Sullins-datasheet-41399304.pdf?src-supplier=Future+Electronics, ComponentLink2URL=https://datasheet.octopart.com:443/NPB02SVAN-RC-Sullins-datasheet-41399304.pdf?src-supplier=Future+Electronics, ComponentLink3Description=https://datasheet.octopart.com:443/NPB02SVAN-RC-Sullins-datasheet-12512856.pdf?src-supplier=Future+Electronics, ComponentLink3URL=https://datasheet.octopart.com:443/NPB02SVAN-RC-Sullins-datasheet-12512856.pdf?src-supplier=Future+Electronics, Contact Plating=Gold, Height=2.9972mm, Lead Free="Lead Free", Lifecycle Status=Production, Number of Positions=2, Packaging=Bulk, Pitch=1.27mm, Pricing 1="1=0.17, 10=0.147, 25=0.1376, 50=0.1308, 100=0.1246, 250=0.11676, 500=0.11116, 1000=0.10585, 3000=0.09795 (USD)", REACH SVHC=Yes, RoHS=Compliant, Stock 1=69438, Supplier 1=DigiKey
JP1: library part Header_2X1, Current Rating=1A, Manufacturer=Harwin, Manufacturer Part Number 1=M50-3530242, Max Operating Temperature=105°C, Min Operating Temperature=-40°C, Supplier Part Number 1=952-3598-ND, ComponentLink1Description=https://datasheet.octopart.com:443/M50-3530242-Harwin-datasheet-179992461.pdf?src-supplier=IHS, ComponentLink1URL=https://datasheet.octopart.com:443/M50-3530242-Harwin-datasheet-179992461.pdf?src-supplier=IHS, Contact Gender=Male, Contact Material=Brass, Country of Origin=Taiwan, Export Control Classification Number (ECCN) Code=EAR99, Harmonized Tariff Schedule (HTS) Code=8536.69.40.40, Height=4.3mm, Introduction Date=2016-09-30, Lifecycle Status=Production, Number of Contacts=2, Number of Pins=2, Number of Rows=1, Pricing 1="1=0.1, 10=0.084, 100=0.0713, 500=0.06358, 1000=0.06054, 5000=0.05403, 10000=0.05145 (USD)", REACH SVHC=Yes, RoHS=Compliant, Stock 1=34961, Supplier 1=DigiKey, Terminal Pitch=1.27mm
L1 MN39 MN40: library part Inductor_0603, DC Current Rating=420, DC Resistance Max=0.58, High Frequency Inductor Case="0402 [1005 Metric]", Inductance=47, Inductance Tolerance="± 5%", Inductor Construction=Wirewound, Manufacturer=COILCRAFT, Manufacturer Part Number=0402HP-47NXJLU, Self Resonant Frequency Min=2.4, Supplier Part Number 1=2285856, Inductor Case Style="0402 [1005 Metric]", Manufacturer Part Number 1=0402HP-47NXJLU, Packaging="Cut Tape", Part Description="INDUCTOR, RF, 47NH, 5%, 2.4GHZ, SMD; Product Range:0402HP Series; Inductance:47nH; Inductance Tolerance:± 5%; High Frequency Inductor Case:0402 [1005 Metric]; Self Resonant Frequency Min:2.4GHz; DC Resistance Max:0.58ohm; DC Current Rating:420mA", Product Range=0402, RoHS=Y-EX, Supplier 1=Farnell, SVHC="No SVHC (15-Jun-2015)"
L2 L3 L4 L5 L6 L7 L8 L9: library part Inductor, Case/Package=0806, Case Code (Metric)=2016, Current Rating=2.81A, DC Resistance (DCR)=41mR, Inductance=470nH, Inductance Tolerance=20%, Manufacturer=TDK, Manufacturer Part Number 1=VLS201610HBX-R47M-1, Max Operating Temperature=105°C, Min Operating Temperature=-40°C, Resistor Type=Wirewound, RMS Current (Irms)=3.3A, Saturation Current=3.5A, Supplier Part Number 1=445-172395-1-ND, Test Frequency=1MHz, Case Code (Imperial)=0806, ComponentLink1Description=http://www.farnell.com/datasheets/2130008.pdf?src-supplier=Farnell, ComponentLink1URL=http://www.farnell.com/datasheets/2130008.pdf?src-supplier=Farnell, ComponentLink2Description=http://www.farnell.com/datasheets/1866267.pdf?src-supplier=Element14, ComponentLink2URL=http://www.farnell.com/datasheets/1866267.pdf?src-supplier=Element14, ComponentLink3Description=http://www.farnell.com/datasheets/2130008.pdf?src-supplier=Element14, ComponentLink3URL=http://www.farnell.com/datasheets/2130008.pdf?src-supplier=Element14, ComponentLink4Description=https://product.tdk.com/info/en/catalog/datasheets/inductor_commercial_power_vls201610hbx-1_en.pdf?src-supplier=Digi-Key, ComponentLink4URL=https://product.tdk.com/info/en/catalog/datasheets/inductor_commercial_power_vls201610hbx-1_en.pdf?src-supplier=Digi-Key, ComponentLink5Description=https://product.tdk.com/info/en/catalog/datasheets/inductor_commercial_power_vls201610hbx-1_en.pdf?ref_disty=digikey&src-supplier=Digi-Key, ComponentLink5URL=https://product.tdk.com/info/en/catalog/datasheets/inductor_commercial_power_vls201610hbx-1_en.pdf?ref_disty=digikey&src-supplier=Digi-Key, Core Material=Metal, Height - Seated (Max)=0.039inch, Length=0.079inch, Mount="Surface Mount", Packaging="Cut Tape", Part Description="470 nH Shielded Drum Core, Wirewound Inductor 2.81 A 41mOhm Max 0806 (2016 Metric)", Pricing 1="1=0,35000, 10=0,31200, 25=0,27320, 50=0,23400, 100=0,21450, 250=0,19504, 500=0,18334, 1000=0,14043 (USD)", Reach SVHC Compliant="No SVHC", RoHS=Yes, RoHS Compliant=Yes, Shielding=Shielded, Stock 1=1817, Supplier 1=Digi-Key, Tolerance=20%, Width=0.063inch
LED1 LED2: Case/Package=SMD/SMT, Color=Green, Forward Voltage=1.97V, Lens Color=Colorless, Manufacturer=Kingbright, Manufacturer Part Number 1=APG0603CGC-TT, Supplier Part Number 1=754-2021-1-ND, Test Current=10mA, ComponentLink1Description=http://www.kingbrightusa.com/images/catalog/SPEC/APG0603CGC-TT.pdf?src-supplier=Digi-Key, ComponentLink1URL=http://www.kingbrightusa.com/images/catalog/SPEC/APG0603CGC-TT.pdf?src-supplier=Digi-Key, Dominant Wavelength=571nm, Height=0.25mm, Lead Free="Lead Free", Length=0.65mm, Lens Transparency=Clear, Luminous Intensity=15mcd, Mount="Surface Mount", Packaging="Tape and Reel", Part Description="Green 571nm LED Indication - Discrete 1.97V 2-SMD, 0201", Pricing 1="1=0,50000, 10=0,30500, 100=0,17530, 1000=0,13720, 2000=0,12577 (USD)", RoHS=Yes, RoHS Compliant=Yes, Stock 1=18826, Supplier 1=Digi-Key, Viewing Angle=140°, Width=0.35mm
MECH1: library part RFI_SHIELD_COVER_BMI-S-202-C, Color=Grey, Manufacturer=Laird, Package Quantity=1400, Supplier Part Number 1=903-1014-ND, ComponentLink1Description=https://www.leadertechinc.com/assets/files/EngineeringDrawings/SMS-206.PDF, ComponentLink1URL=https://www.leadertechinc.com/assets/files/EngineeringDrawings/SMS-206.PDF, ComponentLink2Description=http://www.farnell.com/datasheets/1965028.pdf?src-supplier=Farnell, ComponentLink2URL=http://www.farnell.com/datasheets/1965028.pdf?src-supplier=Farnell, ComponentLink3Description=http://www.mouser.com/ds/2/223/Laird_BMIS_201_210-201562.pdf?src-supplier=Mouser, ComponentLink3URL=http://www.mouser.com/ds/2/223/Laird_BMIS_201_210-201562.pdf?src-supplier=Mouser, ComponentLink4Description=http://www.farnell.com/datasheets/1965028.pdf?src-supplier=Newark, ComponentLink4URL=http://www.farnell.com/datasheets/1965028.pdf?src-supplier=Newark, ComponentLink5Description=http://www.farnell.com/datasheets/1965028.pdf?src-supplier=Element14, ComponentLink5URL=http://www.farnell.com/datasheets/1965028.pdf?src-supplier=Element14, ComponentLink6Description=http://assets.lairdtech.com/home/brandworld/files/Board%20Level%20Shields%20Catalog%20Download.pdf?src-supplier=Digi-Key, ComponentLink6URL=http://assets.lairdtech.com/home/brandworld/files/Board%20Level%20Shields%20Catalog%20Download.pdf?src-supplier=Digi-Key, ComponentLink7Description=http://assets.lairdtech.com/home/brandworld/files/Board%20Level%20Shields%20Catalog%20Download.pdf?src-supplier=Quest, ComponentLink7URL=http://assets.lairdtech.com/home/brandworld/files/Board%20Level%20Shields%20Catalog%20Download.pdf?src-supplier=Quest, Depth=3.6mm, Length=16.5mm, Manufacturer Part Number 1=BMI-S-202-C, Material=Aluminium, Packaging=Bulk, Part Description="RF Shield Cover 0.668\" (16.96mm) X 0.668\" (16.96mm) Vent Holes in Pattern Snap Fit", Pricing 1="1=1,68000, 10=1,51300, 25=1,42760, 100=1,21620, 250=1,14200, 500=0,99924, 1000=0,82795, 2500=0,77085, 5000=0,74230 (USD)", RoHS=Yes, Series="SMT 2 Piece", Stock 1=245970, Supplier 1=Digi-Key, Width=16.5mm
MECH2: library part RFI_SHIELD_FRAME_BMI-S-202-F, Color=Grey, Manufacturer=Laird, Package Quantity=700, Supplier Part Number 1=903-1051-1-ND, ComponentLink1Description=https://www.leadertechinc.com/assets/files/EngineeringDrawings/SMS-206.PDF, ComponentLink1URL=https://www.leadertechinc.com/assets/files/EngineeringDrawings/SMS-206.PDF, ComponentLink2Description=https://datasheet.ciiva.com/2799/bmi-s-202-2799404.pdf?src-supplier=Digi-Key, ComponentLink2URL=https://datasheet.ciiva.com/2799/bmi-s-202-2799404.pdf?src-supplier=Digi-Key, Depth=3.6mm, Length=16.5mm, Manufacturer Part Number 1=BMI-S-202-F, Material=Aluminium, Mount=Solder, Packaging="Tape and Reel", Part Description="RF Shield Frame 0.650\" (16.50mm) X 0.650\" (16.50mm) Surface Mount", Pricing 1="1=1,94000, 10=1,74100, 25=1,64280, 100=1,39970, 250=1,31428 (USD)", Reach SVHC Compliant=Unknown, RoHS=Yes, Stock 1=239502, Supplier 1=Digi-Key, Width=16.5mm
MN1 MN2 MN17 MN18 MN33 MN34: library part Inductor_0603, Case/Package=0402, Case Code (Metric)=1005, Current Rating=500mA, DC Resistance (DCR)=170mR, Inductance=10nH, Manufacturer=Murata, Manufacturer Part Number 1=LQW15AN10NJ00D, Max Operating Temperature=125°C, Min Operating Temperature=-55°C, Package Quantity=10000, Resistor Type=Wirewound, Self Resonant Frequency=5.5GHz, Supplier Part Number 1=490-1146-6-ND, Test Frequency=100MHz, Tolerance=5%, Case Code (Imperial)=0402, ComponentLink1Description=https://datasheet.ciiva.com/11799/0900766b8090d800-11799037.pdf?src-supplier=RSComponents, ComponentLink1URL=https://datasheet.ciiva.com/11799/0900766b8090d800-11799037.pdf?src-supplier=RSComponents, ComponentLink2Description=https://datasheet.ciiva.com/1042/l0075s0080lqw15a-00-1042162.pdf?src-supplier=Digi-Key, ComponentLink2URL=https://datasheet.ciiva.com/1042/l0075s0080lqw15a-00-1042162.pdf?src-supplier=Digi-Key, ComponentLink3Description=https://datasheet.ciiva.com/1042/l0075s0080lqw15a-00-1042163.pdf?src-supplier=Digi-Key, ComponentLink3URL=https://datasheet.ciiva.com/1042/l0075s0080lqw15a-00-1042163.pdf?src-supplier=Digi-Key, ComponentLink4Description=https://datasheet.ciiva.com/1042/l0075s0080lqw15a-00-1042164.pdf?src-supplier=Digi-Key, ComponentLink4URL=https://datasheet.ciiva.com/1042/l0075s0080lqw15a-00-1042164.pdf?src-supplier=Digi-Key, ComponentLink5Description=https://datasheet.ciiva.com/8508/l0075s0080lqw15a-00-8508743.pdf?src-supplier=Avnet, ComponentLink5URL=https://datasheet.ciiva.com/8508/l0075s0080lqw15a-00-8508743.pdf?src-supplier=Avnet, ComponentLink6Description=https://datasheet.ciiva.com/18089/getdatasheetpartid-110925-18089287.pdf?src-supplier=Verical, ComponentLink6URL=https://datasheet.ciiva.com/18089/getdatasheetpartid-110925-18089287.pdf?src-supplier=Verical, ComponentLink7Description=https://datasheet.ciiva.com/16210/l0075s0080lqw15a-00-16210412.pdf?src-supplier=Future+Electronics, ComponentLink7URL=https://datasheet.ciiva.com/16210/l0075s0080lqw15a-00-16210412.pdf?src-supplier=Future+Electronics, Core Material=Air,Ferrite, DC Current=500mA, Depth=0.7mm, Height=0.5mm, Lead Free="Lead Free", Length=1mm, Max DC Current=500mA, Military Standard=Not, Mount="Surface Mount", Packaging="Tape and Reel", Part Description="RF Inductors - SMD 10 NH 5%", Pricing 1="1=0,16000, 10=0,14200, 25=0,12600, 50=0,10720, 100=0,09450, 250=0,08664, 500=0,07876, 1000=0,06615, 2500=0,05670 (USD)", Q Factor=25, Radiation Hardening=No, Rated Current-Max=500mA, RoHS=Yes, RoHS Compliant=Yes, Series=LQW15A_00, Shielding=Unshielded, Stock 1=158333, Supplier 1=Digi-Key, Termination=SMD/SMT, Weight=2.8E-05oz, Width=0.02inch
MN3 MN6 MN23 MN24 MN29 MN30: library part Cap_0402, Capacitance=10pF, Case/Package=0402, Case Code (Metric)=1005, Dielectric=C0G, Manufacturer="Walsin Technologies", Manufacturer Part Number 1=0402N100D500CT, Max Operating Temperature=125°C, Min Operating Temperature=-55°C, Supplier Part Number 1=1292-0402N100D500CT-ND, Voltage Rating=50V, Applications="General Purpose", Case Code (Imperial)=0402, ComponentLink1Description=http://www.farnell.com/datasheets/2340522.pdf?src-supplier=Farnell, ComponentLink1URL=http://www.farnell.com/datasheets/2340522.pdf?src-supplier=Farnell, ComponentLink2Description=http://www.farnell.com/datasheets/1958513.pdf?src-supplier=Element14, ComponentLink2URL=http://www.farnell.com/datasheets/1958513.pdf?src-supplier=Element14, Packaging="Tape and Reel", Part Description="10 pF ±0.5pF 50V Ceramic Capacitor C0G, NP0 0402 (1005 Metric)", Pricing 1="1=0,10000, 10=0,01200, 50=0,00660, 100=0,00540, 500=0,00388, 1000=0,00306, 2500=0,00278, 5000=0,00256 (USD)", RoHS=Yes, RoHS Compliant=Yes, Stock 1=66767, Supplier 1=Digi-Key, Voltage Rating (DC)=50V
MN4 MN25 MN26: library part Cap_0402, Capacitance=0.50pF, Manufacturer=Yageo, Manufacturer Part Number 1=CC0402CRNPO9BNR50, Operating Temperature="-55°C ~ 125°C", Package / Case="0402 (1005 Metric)", Ratings=-, Supplier Part Number 1=311-1001-1-ND, Temperature Coefficient="C0G, NP0", Tolerance=±0.25pF, Voltage - Rated=50V, Applications="General Purpose", Category=Capacitors, Features=-, Height - Seated (Max)=-, Lead Spacing=-, Lead Style=-, Mounting Type="Surface Mount, MLCC", Packaging="Cut Tape (CT)", Part Description="0.50pF ±0.25pF 50V C0G, NP0 Ceramic Capacitor -55°C ~ 125°C Surface Mount, MLCC 0402 (1005 Metric) 0.039\" L x 0.020\" W (1.00mm x 0.50mm)", RoHS="RoHS Compliant", Size / Dimension="0.039\" L x 0.020\" W (1.00mm x 0.50mm)", Supplier 1=Digi-Key, Thickness (Max)="0.022\" (0.55mm)"
MN5: library part Cap_0402, Manufacturer="TDK Corporation", Manufacturer Part Number 1=C1005C0G1H010B050BA, Operating Temperature="-55°C ~ 125°C", Package / Case="0402 (1005 Metric)", Ratings=-, Supplier Part Number 1=445-4854-6-ND, Temperature Coefficient="C0G, NP0", Tolerance=±0.1pF, Voltage - Rated=50V, Applications="General Purpose", Capacitance=1pF, Category=Capacitors, Features=-, Height - Seated (Max)=-, Lead Spacing=-, Lead Style=-, Mounting Type="Surface Mount, MLCC", Packaging=Digi-Reel®, Part Description="1pF ±0.1pF 50V C0G, NP0 Ceramic Capacitor -55°C ~ 125°C Surface Mount, MLCC 0402 (1005 Metric) 0.039\" L x 0.020\" W (1.00mm x 0.50mm)", RoHS="RoHS Compliant", Size / Dimension="0.039\" L x 0.020\" W (1.00mm x 0.50mm)", Supplier 1=Digi-Key, Thickness (Max)="0.022\" (0.55mm)"
MN7 MN8: library part Inductor_0603, Current - Saturation=-, Current Rating=2mA, DC Resistance (DCR)="3.1 Ohm Max", Frequency - Self Resonant=7MHz, Frequency - Test=1MHz, Inductance=100µH, Manufacturer="TDK Corporation", Manufacturer Part Number 1=MLF2012C101KT000, Operating Temperature="-40°C ~ 85°C", Package / Case="0805 (2012 Metric)", Q @ Freq="25 @ 1MHz", Supplier Part Number 1=445-1071-1-ND, Tolerance=±10%, Category="Inductors, Coils, Chokes", Height - Seated (Max)="0.057\" (1.45mm)", Material - Core=Ferrite, Mounting Type="Surface Mount", Packaging="Cut Tape (CT)", Part Description="FIXED IND 100UH 2MA 3.1 OHM SMD", RoHS="RoHS Compliant", Shielding=Shielded, Size / Dimension="0.079\" L x 0.049\" W (2.00mm x 1.25mm)", Supplier 1=Digi-Key, Supplier Device Package="0805 (2012 Metric)", Type=Multilayer
MN9 MN10 R15 R65 R69 R147 R201 R202 R204 R205: library part Res_0402, Manufacturer=Yageo, Manufacturer Part Number 1=RC0402JR-070RL, Operating Temperature="-55°C ~ 155°C", Package / Case="0402 (1005 Metric)", Power (Watts)="0.063W, 1/16W", Resistance (Ohms)=0.0, Supplier Device Package=0402, Supplier Part Number 1=311-0.0JRTR-ND, Temperature Coefficient=-, Tolerance=Jumper, Category=Resistors, Composition="Thick Film", Features="Moisture Resistant", Height="0.016\" (0.40mm)", Number of Terminations=2, Packaging="Tape & Reel (TR)", Part Description="RES SMD 0.0OHM JUMPER 1/16W 0402", RoHS="RoHS Compliant", Size / Dimension="0.039\" L x 0.020\" W (1.00mm x 0.50mm)", Supplier 1=Digi-Key
MN11 MN14: library part Cap_0402, Capacitance="0.1 uF", Case Code - in=0402, Case Code - mm=1005, Case Height="0.5 mm", Case Length="1 mm", Dielectric=X7R, Manufacturer="Murata Electronics", Manufacturer Part Number=GRM155R71C104KA88D, Maximum Operating Temperature="+ 125 C", Minimum Operating Temperature="- 55 C", Operating Temperature Range="- 55 C to + 125 C", Package / Case="0402 (1005 metric)", Supplier Part Number 1=81-GRM155R71C104KA88, Temperature Coefficient / Code="+/- 15 %", Tolerance="10 %", Voltage Rating DC="16 V", Brand="Murata Electronics", Case Width="0.5 mm", Category="Multilayer Ceramic Capacitors MLCC - SMD/SMT", Manufacturer Part Number 1=GRM155R71C104KA88D, Minimum Order Quantity=1, Packaging=Reel, Part Description="0.10µF ±10% 16V X7R Ceramic Capacitor -55°C ~ 125°C Surface Mount, MLCC 0402 (1005 Metric) 0.039\" L x 0.020\" W (1.00mm x 0.50mm)", Product="General Type MLCCs", Product Category="Low & Medium Capacitance SMD Ceramic Chip Capacitors", Reeling=True, RoHS="RoHS Compliant", RoHS - Mouser=Y, Series=GRM, Standard Pack Qty=10000, Supplier 1=Mouser, Termination Style=SMD/SMT, Type="General Purpose MLCC"
MN12 MN19 MN20 MN27 MN28: library part Cap_0402, Capacitance=1pF, Manufacturer="TDK Corporation", Manufacturer Part Number 1=C1005C0G1H010B050BA, Operating Temperature="-55°C ~ 125°C", Package / Case="0402 (1005 Metric)", Ratings=-, Supplier Part Number 1=445-4854-6-ND, Temperature Coefficient="C0G, NP0", Tolerance=±0.1pF, Voltage - Rated=50V, Applications="General Purpose", Category=Capacitors, Features=-, Height - Seated (Max)=-, Lead Spacing=-, Lead Style=-, Mounting Type="Surface Mount, MLCC", Packaging=Digi-Reel®, Part Description="1pF ±0.1pF 50V C0G, NP0 Ceramic Capacitor -55°C ~ 125°C Surface Mount, MLCC 0402 (1005 Metric) 0.039\" L x 0.020\" W (1.00mm x 0.50mm)", RoHS="RoHS Compliant", Size / Dimension="0.039\" L x 0.020\" W (1.00mm x 0.50mm)", Supplier 1=Digi-Key, Thickness (Max)="0.022\" (0.55mm)"